# Altium PCB detector.PcbDoc
Units mm, origin at the board's own origin, x right, y up, seen from the top; angles counter-clockwise.
Board outline 28 x 20 mm, 2 copper layers (Top Layer, Bottom Layer); 9 components, 5 nets, 27 pads, 0 vias.
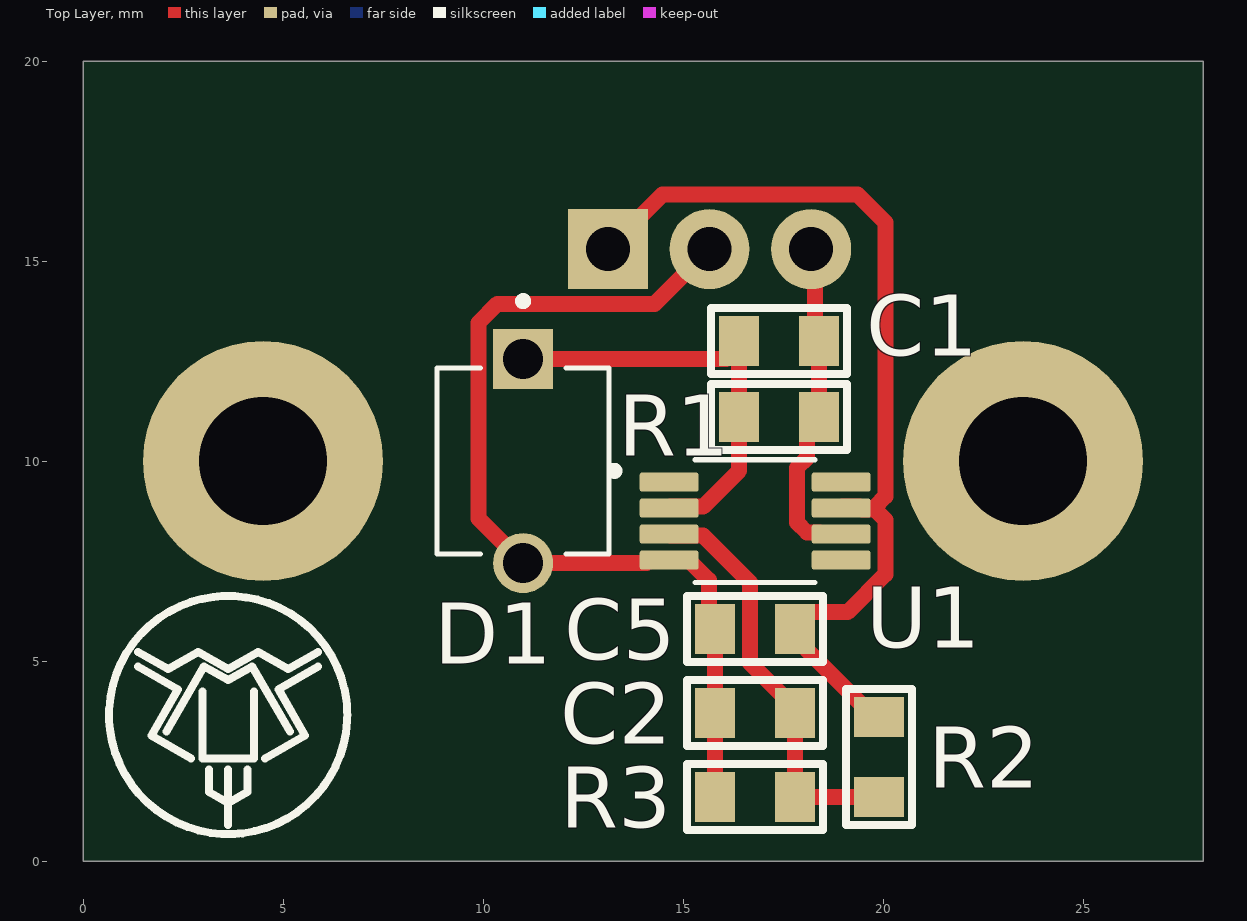
[diagram p0: Top Layer view]
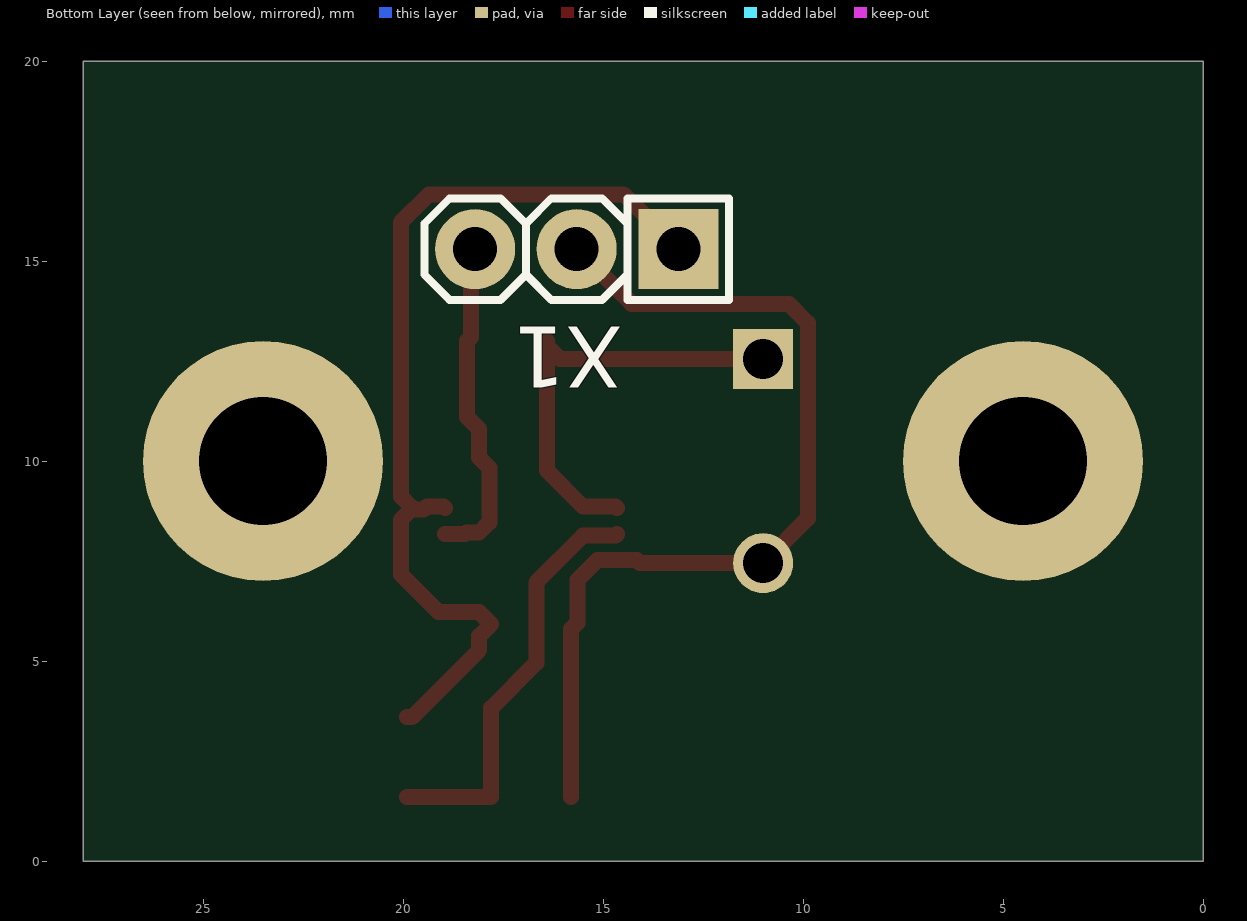
[diagram p1: Bottom Layer view, seen from below]
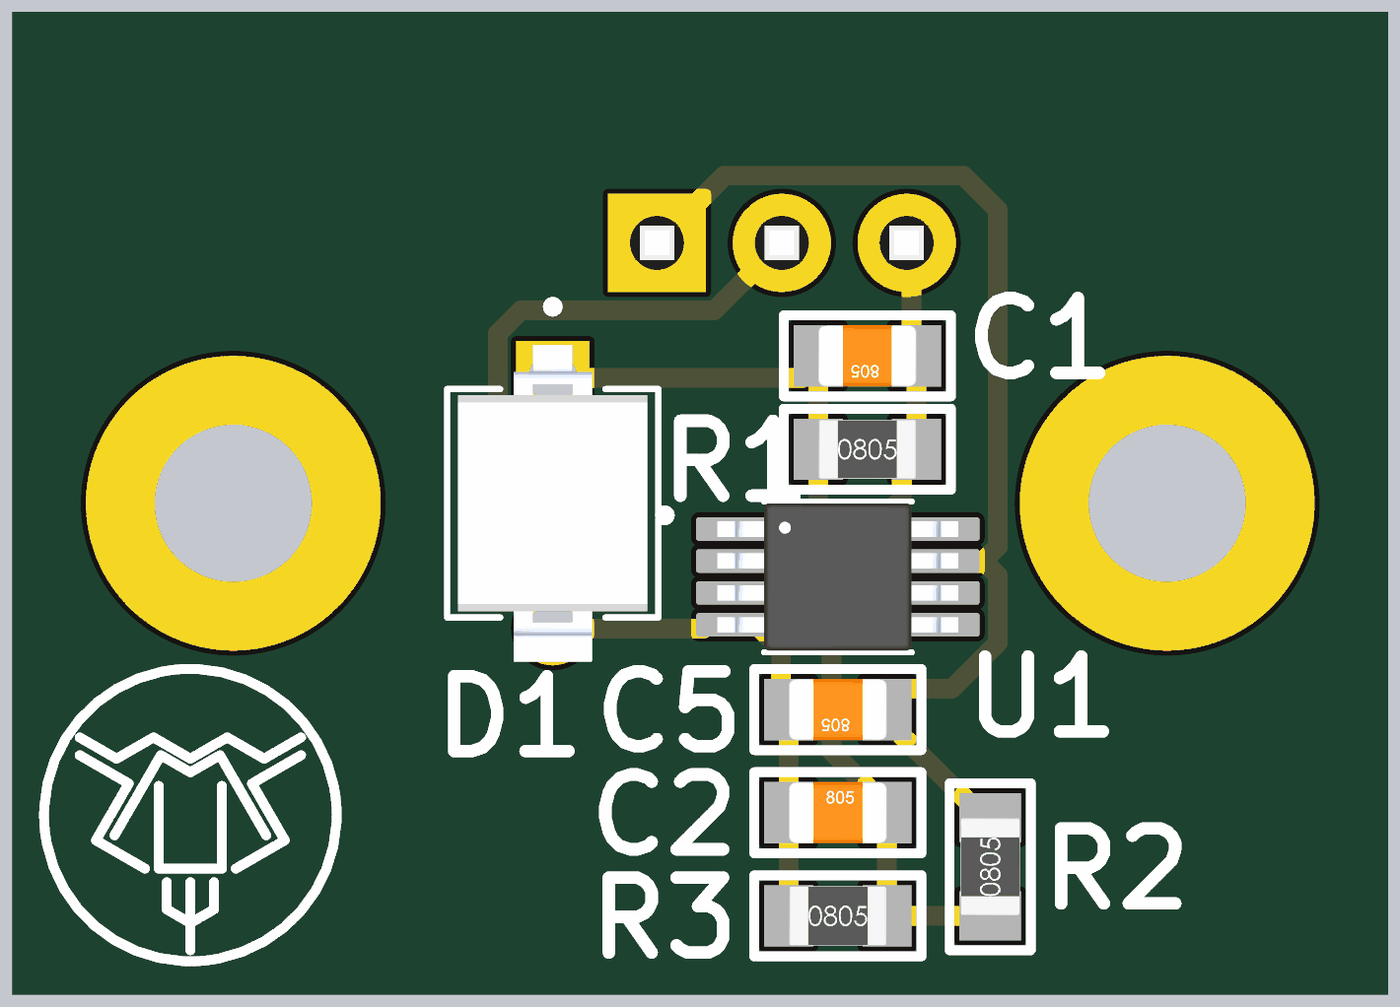
[diagram p2: 3D render of the assembled board from above, using the file's embedded part models]

## Layer stack, top to bottom
Top Solder: solder mask 0.0102, Solder Resist, Dk 3.5
Top Layer: signal copper 0.0356
Dielectric 1: dielectric 0.32, FR-4, Dk 4.8
Bottom Layer: signal copper 0.0356
Bottom Solder: solder mask 0.0102, Solder Resist, Dk 3.5

## Board outline
0,0 0,20 28,20 28,0

## Design rules (kind name [scope] priority, off if disabled: settings)
Clearance [All] p1: gap=0.17 ignorepadtopadclearanceinfootprint=FALSE
PolygonConnect [All] p1: connectstyle=Relief reliefconductorwidth=0.254 reliefentries=4 polygonreliefangle="90 Angle" airgapwidth=0.254
RoutingVias [All] p1: holewidth=0.711 width=1.27 viastyle="Through Hole" minholewidth=0.711 minwidth=1.27 maxholewidth=0.711 maxwidth=1.27
SolderMaskExpansion [All] p1: expansion=0.102 istentingtop=FALSE
SupplyNets "Schematic Supply Nets_1" [InNet('GND')] p1: voltage=0.000
SupplyNets "Schematic Supply Nets" [InNet('+3.3')] p2: voltage=0.000
Width [All] p1: maxlimit=0.5 minlimit=0.254 preferedwidth=0.4
30 further rules are at their usual default settings.

## Components (designator, comment, footprint, x,y, rotation, side; value= is the part's Value field where it differs from the comment)
C1 "Ceramic capacitor, 6.8pF, X7R, ±10%, 16V, 0805, -55...+125°C" "CAP: 0805" 17.4,13 r180 top value=6.8pF
C2 "Ceramic capacitor, 1μF, X7R, ±10%, 16V, 0805, -55...+125°C" "CAP: 0805" 16.8,3.7 r0 top value=1μF
C5 "Ceramic capacitor, 0.1μF, X7R, ±10%, 16V, 0805, -55...+125°C" "CAP: 0805" 16.8,5.8 r180 top value=0.1μF
D1 "BPW34" DIO_BPW34 11,10 r270 top locked
R1 "Resistor film, 1.2M, ±5%, 0805, 0.125W, -55...+125°C" "RES: 0805" 17.4,11.1 r0 top value=1.2M
R2 "Resistor film, 12k, ±5%, 0805, 0.125W, -55...+125°C" "RES: 0805" 19.9,2.6 r90 top value=12k
R3 "Resistor film, 390R, ±5%, 0805, 0.125W, -55...+125°C" "RES: 0805" 16.8,1.6 r0 top value=390R
U1 "OPA381AIDGKR" SOP65P490X110-8N 16.8,8.5 r0 top
X1 "Connector, 3pin, 2.54mm, 500VAC, 3A" "CON: PLS-3R" 15.66,15.3 r0 bottom

## Footprints (in the part's own frame and the unit in brackets; to place one, negate y for a bottom-side part, rotate by r counter-clockwise, add the part's x,y. Pads: shape width x height; smd on the part's side, far side on the other; paste and mask are expansions set on the pad)
"CAP: 0805" [mm]
  rect 1x1.25 smd: 1(-1,0) 2(1,0)
  silkscreen extent -1.7,-0.82 1.7,0.82, body extent -1,-0.62 1,0.63, height 0.78
"CON: PLS-3R" [mm]
  rect 2x2 hole 1.1: 1(-2.54,0)
  round 2 hole 1.1: 2(0,0) 3(2.54,0)
  silkscreen extent -3.81,-1.27 3.81,1.27, body extent -3.81,-1.27 3.81,7.35, height 5.55
DIO_BPW34 [mm]
  round 1.5 hole 1: A(2.55,0)
  rect 1.5x1.5 / inner round 1.5 / far side rect 1.5x1.5 hole 1: C(-2.55,0)
  silkscreen extent -4.1,-2.15 2.32,2.15, body extent -3.22,-1.92 3.22,1.92, height 1.3
"RES: 0805" [mm]
  rect 1x1.25 smd: 1(-1,0) 2(1,0)
  silkscreen extent -1.7,-0.82 1.7,0.82, body extent -1,-0.6 1,0.6, height 0.44
SOP65P490X110-8N [mm]
  rrect25% 1.47x0.48 smd paste+0 mask+0.102: 1(-2.15,0.975) 2(-2.15,0.325) 3(-2.15,-0.325) 4(-2.15,-0.975) 5(2.15,-0.975) 6(2.15,-0.325) 7(2.15,0.325) 8(2.15,0.975)
  silkscreen extent -3.62,-1.54 1.5,1.54, body extent -2.45,-1.5 2.45,1.5, height 1.1

## Part data
C1 C2 C5: library part Ceramic_0805, Manufacturer=Yageo, Package=0805, PartNumber=CC0805KRX7R7BB104, Temperature=-55...+125°C, Tolerance=±10%, TypeCapacitor="Ceramic capacitor", TypeDielectric=X7R, Voltage=16V, HelpURL=https://www.digikey.com/product-detail/en/yageo/CC0805KRX7R7BB104/311-1142-1-ND/303052
  C1: ValueManufacturerPartNumber="Ceramic capacitor, 6.8pF, X7R, ±10%, 16V, 0805, -55...+125°C"
  C2: ValueManufacturerPartNumber="Ceramic capacitor, 1μF, X7R, ±10%, 16V, 0805, -55...+125°C"
  C5: ValueManufacturerPartNumber="Ceramic capacitor, 0.1μF, X7R, ±10%, 16V, 0805, -55...+125°C"
D1: "Photodiode 850nm 20ns 120Â° 2-DIP (0.213, 5.40mm)", Package="SMD-2 OSRAM Opto Semiconductors", Check_prices=https://www.snapeda.com/parts/BPW%2034/OSRAM/view-part/?ref=eda, MF="OSRAM Opto Semiconductors", MP="BPW 34", PartNumber=BPW34, SnapEDA_Link=https://www.snapeda.com/parts/BPW%2034/OSRAM/view-part/?ref=snap
R1 R2 R3: library part Resistor_0805, Manufacturer=Yageo, Package=0805, PartNumber=RC0805JR-07100RL, Power=0.125W, Temperature=-55...+125°C, Tolerance=±5%, TypeResistor="Resistor film", HelpURL=https://www.digikey.com/product-detail/en/yageo/RC0805JR-07100RL/311-100ARCT-ND/731185
  R1: ValueManufacturerPartNumber="Resistor film, 1.2M, ±5%, 0805, 0.125W, -55...+125°C"
  R2: ValueManufacturerPartNumber="Resistor film, 12k, ±5%, 0805, 0.125W, -55...+125°C"
  R3: ValueManufacturerPartNumber="Resistor film, 390R, ±5%, 0805, 0.125W, -55...+125°C"
U1: "Precision, Low Power, High-Speed Transimpedance Amplifier", Package="VSSOP-8 Texas Instruments", PartNumber=OPA381, Check_prices=https://www.snapeda.com/parts/OPA381AIDGKR/Texas+Instruments/view-part/?ref=eda, MF="Texas Instruments", MP=OPA381AIDGKR, SnapEDA_Link=https://www.snapeda.com/parts/OPA381AIDGKR/Texas+Instruments/view-part/?ref=snap
X1: library part PLS-3R, CurrentMax=3A, Manufacturer=Connfly, VoltageMax=500VAC, CommentText="\"Разъем\"", HelpURL=https://www.chipdip.ru/product/pls-3, Multichannel=3pin, PartNumber=PLS-3R, Pitch=2.54mm, TypeConnector=Connector, ValueManufacturerPartNumber="Connector, 3pin, 2.54mm, 500VAC, 3A"

## Free pads (board coordinates)
  round 6 hole 3.2 unplated paste-2539.97: 5(23.5,10) 6(4.5,10)

## Nets (pads, with @x,y where several pads share a name; then routed paths per layer and width w, separated by ;. In a path a pad name is that pad's centre, name@x,y a point inside that pad or via, vN(x,y) a via of type N, cw(c..) or ccw(c..) an arc to the next point about the centre after c; other vN are vias at no path point)
+3.3: C5.1 R2.2 U1.7 X1.1 | length 23.7
  Top Layer w0.4: X1.1 14.49,16.67 19.353,16.67 20.055,15.968 20.055,9.117 19.803,8.865 ; U1.7 18.99,8.865 19.405,8.865 19.485,8.785 19.803,8.785 20.055,8.533 20.055,7.167 19.113,6.225 18.1,6.225 17.8,5.925 18.1,5.625 18.1,5.275 19.775,3.6 R2.2
GND: C2.1 C5.2 D1.A R3.1 U1.4 X1.2 | length 23.4
  Top Layer w0.4: X1.2 14.29,13.93 10.357,13.93 9.88,13.453 9.88,8.57 D1.A 14.08,7.45 14.155,7.525 U1.4 15.145,7.525 15.645,7.025 15.645,5.955 C5.2 C2.1 R3.1
NetC1_1: C1.1 R1.2 U1.6 X1.3 | length 8.4
  Top Layer w0.4: X1.3 18.3,15.2 18.3,13.1 C1.1 R1.2 18.1,10.8 18.1,10.088 17.845,9.833 17.845,8.467 18.097,8.215 18.415,8.215 18.455,8.175 U1.6
NetC1_2: C1.2 D1.C R1.1 U1.2 | length 11
  Top Layer w0.4: D1.C 16.075,12.55 16.4,12.875 C1.2 R1.1 16.4,9.762 15.503,8.865 14.69,8.865 U1.2
NetC2_2: C2.2 R2.1 R3.2 U1.3 | length 10.5
  Top Layer w0.4: U1.3 14.69,8.135 15.503,8.135 16.67,6.968 16.67,4.955 17.8,3.825 C2.2 R3.2 R2.1
pads on no net: U1.1 U1.5 U1.8

## Silkscreen, mask and mechanical layers (free items; w line width, h text height)
Top Overlay:
  lines w0.2: 1.375,4.87 2.373,4.294 1.705,3.138 2.703,2.562 ; 1.375,5.233 2.125,4.8 2.876,5.233 3.626,4.8 4.377,5.233 5.128,4.8 5.878,5.233 ; 2.084,3.24 3.025,4.87 3.626,4.523 4.228,4.87 5.169,3.24 ; 2.984,4.246 2.984,2.562 3.626,2.562 4.268,2.562 4.268,4.246 ; 3.147,2.285 3.147,1.731 3.626,1.454 ; 3.626,0.9 3.626,1.454 ; 3.626,2.285 3.626,1.454 ; 4.106,2.285 4.106,1.731 3.626,1.454 ; 4.55,2.562 5.548,3.138 4.88,4.294 5.878,4.87 ; 6.604,3.652 ccw(c3.578,3.652) 6.6,3.809 ccw(c3.609,3.654) 6.582,4.016 ccw(c3.626,3.651) 3.778,6.626 ccw(c3.627,3.603) 3.626,6.629 ccw(c3.626,3.603) 3.47,6.625 ccw(c3.625,3.635) 3.262,6.607 ccw(c3.627,3.652) 0.653,3.804 ccw(c3.675,3.652) 0.649,3.652 ccw(c3.675,3.652) 0.653,3.495 ccw(c3.644,3.65) 0.671,3.288 ccw(c3.627,3.653) 3.474,0.678 ccw(c3.626,3.701) 3.626,0.675 ccw(c3.627,3.701) 3.783,0.679 ccw(c3.628,3.669) 3.991,0.697 ccw(c3.626,3.652) 6.6,3.5 ccw(c3.577,3.652) 6.604,3.652 ; 6.604,3.652 6.604,3.652
Mechanical 1:
  the board outline again, w0.254